# Altium PCB kardio (5).pcbdoc
Units mm, origin at the board's own origin, x right, y up, seen from the top; angles counter-clockwise.
Board outline 75 x 75 mm, 2 copper layers (Top Layer, Bottom Layer); 36 components, 33 nets, 151 pads, 24 vias.
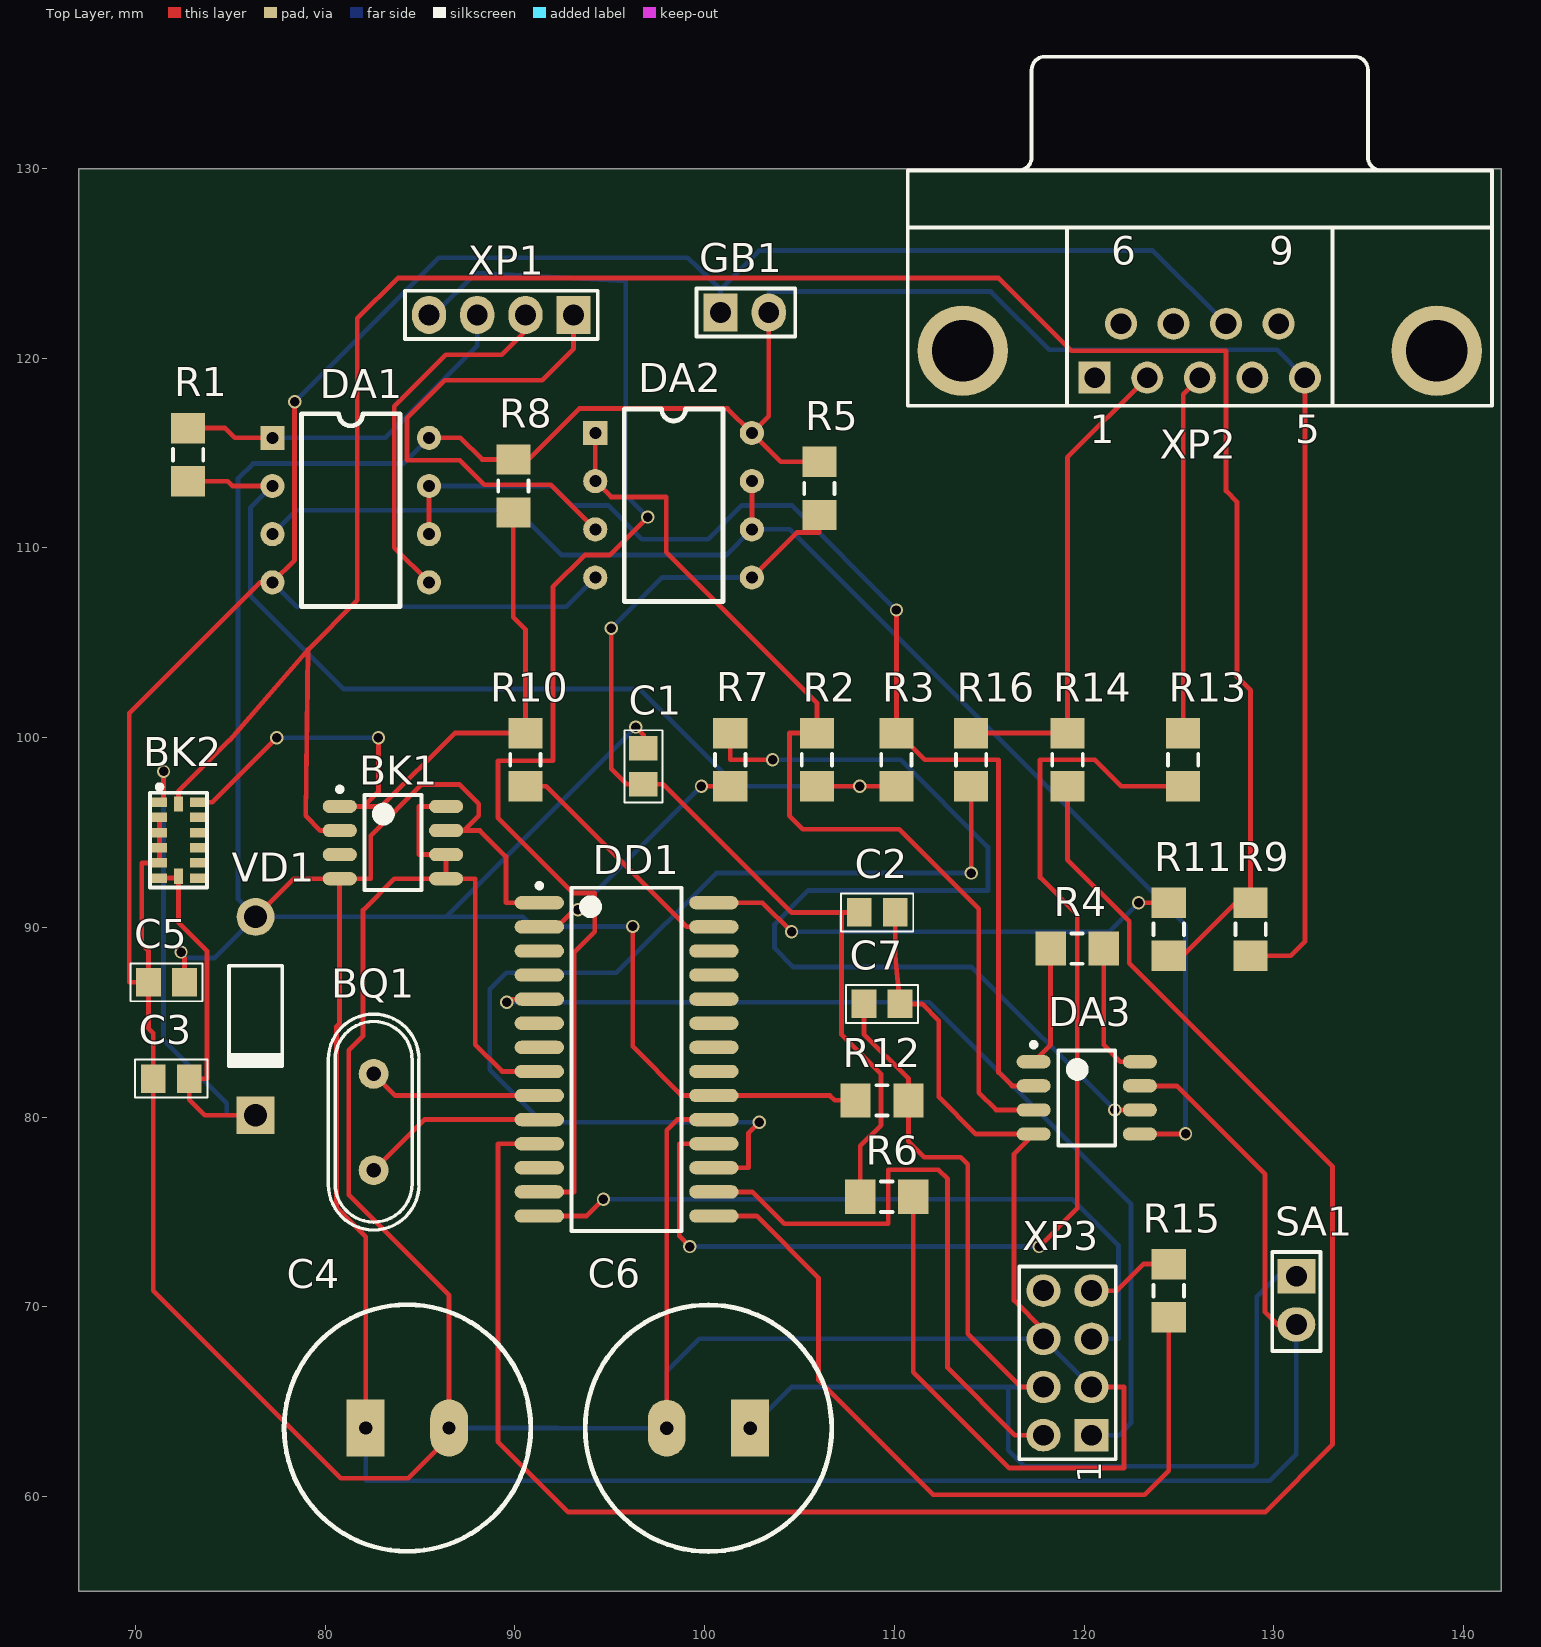
[diagram p0: Top Layer view]
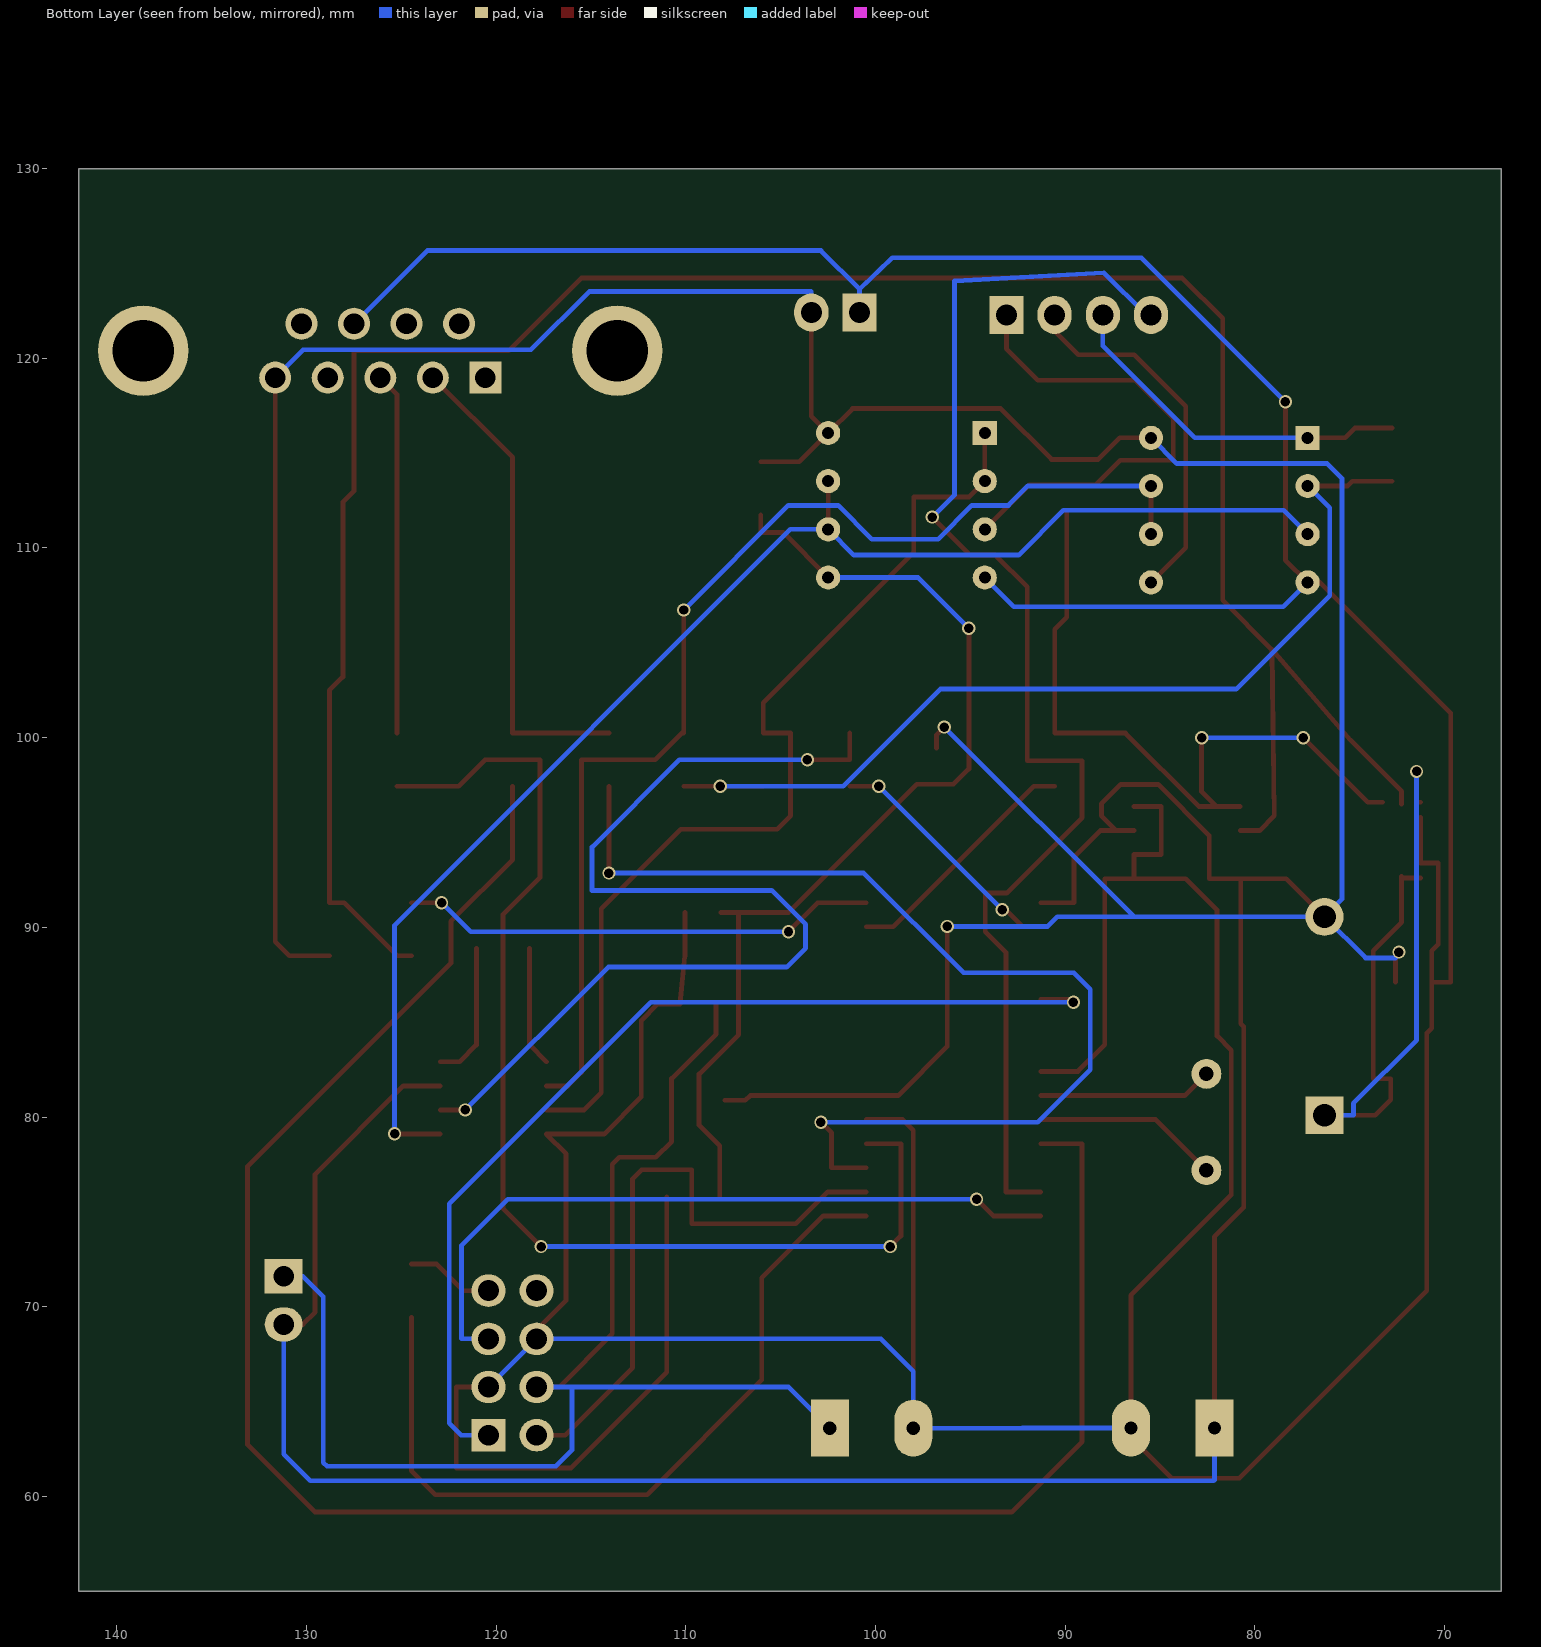
[diagram p1: Bottom Layer view, seen from below]

## Layer stack, top to bottom
Top Layer: signal copper 0.0356
Dielectric: dielectric 0.32, FR-4, Dk 4.8
Bottom Layer: signal copper 0.0356

## Board outline
67,55 142,55 142,130 67,130

## Design rules (kind name [scope] priority, off if disabled: settings)
Clearance [All] p1: gap=0.4
PolygonConnect [All] p1: connectstyle=Relief reliefconductorwidth=0.254 reliefentries=4 polygonreliefangle="90 Angle" airgapwidth=0.254
RoutingCorners [All] p1: cornerstyle=Round minsetback=0.2 maxsetback=2.54
RoutingVias [All] p1: holewidth=0.5 width=0.7 viastyle="Through Hole" minholewidth=0.5 minwidth=0.7 maxholewidth=0.711 maxwidth=1.27
SolderMaskExpansion [All] p1: expansion=0.102
Width [All] p1: maxlimit=0.25 minlimit=0.25 preferedwidth=0.25
27 further rules are at their usual default settings.

## Components (designator, comment, footprint, x,y, rotation, side; value= is the part's Value field where it differs from the comment)
BK1 "DS1621" SOIC-8CM 83.566,94.472 r0 top
BK2 "MMA7455LT" SOJ80P300X0-12M 72.263,94.599 r0 top
BQ1 "10МГц" HC49S 82.55,79.74 r90 top
C1 "0.22мк" C0805 96.774,98.489 r90 top
C2 "0.22мк" C0805 109.093,90.789 r180 top
C3 "0.1мк" C0805 71.882,82.026 r180 top
C4 "1000мк" "LZ 12x26 1000 мкФ x 25 В" 84.328,63.611 r0 top
C5 "0.1мк" C0805 71.628,87.106 r180 top
C6 "1000мк" "LZ 12x26 1000 мкФ x 25 В" 100.2,63.6 r180 top
C7 "0.1мк" C0805 109.347,85.963 r0 top
DA1 "КР1446УД1" PDIP8 77.216,115.808 r0 top
DA2 "КР1446УД1" PDIP8 94.234,116.062 r0 top
DA3 "AD623" SOIC-8CM 120.142,81.01 r0 top
DD1 "PIC16F873A" SOIC-SO28_M 95.885,83.042 r0 top
GB1 "3.6B" Button 104.521,123.428 r0 top
R1 "720К" 1206 72.771,114.919 r270 top
R2 "20К" 1206 105.918,98.841 r90 top
R3 "20К" 1206 110.109,98.841 r90 top
R4 "20К" 1206 119.634,88.884 r180 top
R5 "150К" 1206 106.045,113.141 r90 top
R6 "150К" 1206 109.601,75.803 r180 top
R7 "300" 1206 101.346,98.841 r270 top
R8 "4К7" 1206 89.916,113.268 r270 top
R9 "4К7" 1206 128.778,89.9 r90 top
R10 "300" 1206 90.551,98.841 r270 top
R11 "300" 1206 124.46,89.9 r90 top
R12 "10" 1206 109.347,80.883 r0 top
R13 "300" 1206 125.222,98.841 r90 top
R14 "300" 1206 119.126,98.841 r90 top
R15 "300" 1206 124.46,70.85 r90 top
R16 "300" 1206 114.046,98.841 r90 top
SA1 "Button" Button 132.207,67.929 r270 top
VD1 "КД522" DO-41 76.327,85.328 r270 top
XP1 "INPUT" "HDR1X4 - WA" 93.091,122.285 r180 top
XP2 "COM-port" COM-port 126.1,129.9 r0 top
XP3 "SD-card" "HDR2X4 - wide area" 120.396,63.23 r90 top

## Footprints (in the part's own frame and the unit in brackets; to place one, negate y for a bottom-side part, rotate by r counter-clockwise, add the part's x,y. Pads: shape width x height; smd on the part's side, far side on the other; paste and mask are expansions set on the pad)
1206 [mm] "Chip Resistor; Body 3.1 x 1.6 mm (LxW typ)"
  rect 1.6x1.8 smd: 1(-1.4,0) 2(1.4,0)
  silkscreen extent -0.3,-0.8 0.3,0.8
Button [mm]
  rect 1.8x2 hole 1.1: 1(-3.683,-1.016)
  oval 1.8x2 hole 1.1: 2(-1.143,-1.016)
  silkscreen extent -4.95,-2.29 0.25,0.25
C0805 [mm] "Chip Capacitor; Body 2.0 x 1.2 mm (LxW typ)"
  rect 1.3x1.5 smd: 1(-0.95,0) 2(0.95,0)
  silkscreen extent -1.9,-1 1.91,1
COM-port [mm] "Connector; D Subminiature AMPLIMITE 2000; 9 Position; Right Angle"
  rect 1.69x1.69 hole 1.09: 1(-5.54,-10.92)
  round 1.69 hole 1.09: 2(-2.77,-10.92) 3(0,-10.92) 4(2.77,-10.92) 5(5.54,-10.92) 6(-4.155,-8.08) 7(-1.385,-8.08) 8(1.385,-8.08) 9(4.155,-8.08)
  round 4.76 hole 3.26: 10(-12.495,-9.5) 11(12.495,-9.5)
  silkscreen extent -15.4,-12.4 15.4,6, body extent -15.4,-12.4 15.4,6, height 12.75
DO-41 [mm] "Diode, Axial; Body 5.2 x 2.7 mm (LxDia. max), Lead Dia. 0.86 mm (max)"
  round 2 hole 1.2: 1(-5.23,0)
  rect 2x2 hole 1.2: 2(5.23,0)
  silkscreen extent -2.65,-1.4 2.75,1.4
HC49S [mil]
  round 62 hole 30: 1(-100,0) 2(100,0)
  silkscreen extent -224,-94 224,94
"HDR1X4 - WA" [mm] "Разъем двухрядный, шаг 2,54 мм."
  rect 1.8x2 hole 1.1: 1(0,0)
  oval 1.8x2 hole 1.1: 2(2.54,0) 3(5.08,0) 4(7.62,0)
  silkscreen extent -1.27,-1.27 8.89,1.27
"HDR2X4 - wide area" [mm] "Connector; Header; 4x2 Position"
  rect 1.7x1.8 hole 1.1: 1(0,0)
  oval 1.7x1.8 hole 1.1: 2(0,2.54) 3(2.54,0) 4(2.54,2.54) 5(5.08,0) 6(5.08,2.54) 7(7.62,0) 8(7.62,2.54)
  silkscreen extent -1.27,-1.27 8.89,3.81
"LZ 12x26 1000 мкФ x 25 В" [mm] "D=12.0 d=0.7 S=4.4"
  rect 2x3 hole 0.7: 1(-2.2,0)
  oval 2x3 hole 0.7: 2(2.2,0)
  silkscreen extent -6.5,-6.5 6.5,6.5
PDIP8 [mm]
  rect 1.27x1.27 hole 0.635: 1(0,0)
  round 1.27 hole 0.635: 2(0,-2.54) 3(0,-5.08) 4(0,-7.62) 5(8.255,-7.62) 6(8.255,-5.08) 7(8.255,-2.54) 8(8.255,0)
  silkscreen extent 1.52,-8.89 6.73,1.27
SOIC-8CM [mm] "SOIC, 8-Leads, Body 4.9x3.9mm, Pitch 1.27mm, IPC Low Density"
  oval 1.8x0.7 smd: 1(-2.8,1.905) 2(-2.8,0.635) 3(-2.8,-0.635) 4(-2.8,-1.905) 5(2.8,-1.905) 6(2.8,-0.635) 7(2.8,0.635) 8(2.8,1.905)
  silkscreen extent -2.92,-2.5 1.5,2.93, body extent -2,-2.5 2,2.5, height 1.73
SOIC-SO28_M [mm] "SOIC, 28-Leads, Body 17.9x7.5mm, Pitch 1.27mm, IPC Low Density"
  oval 2.6x0.7 smd: 1(-4.6,8.255) 2(-4.6,6.985) 3(-4.6,5.715) 4(-4.6,4.445) 5(-4.6,3.175) 6(-4.6,1.905) 7(-4.6,0.635) 8(-4.6,-0.635) 9(-4.6,-1.905) 10(-4.6,-3.175) 11(-4.6,-4.445) 12(-4.6,-5.715) 13(-4.6,-6.985) 14(-4.6,-8.255) 15(4.6,-8.255) 16(4.6,-6.985) 17(4.6,-5.715) 18(4.6,-4.445) 19(4.6,-3.175) 20(4.6,-1.905) 21(4.6,-0.635) 22(4.6,0.635) 23(4.6,1.905) 24(4.6,3.175) 25(4.6,4.445) 26(4.6,5.715) 27(4.6,6.985) 28(4.6,8.255)
  silkscreen extent -4.72,-9.05 2.9,9.28, body extent -3.8,-9.06 3.8,9.06, height 2.65
SOJ80P300X0-12M [mm] "SOJ, 12-Leads, Body 5,00x3,00mm, Pitch 0,80mm, IPC Low Density"
  rect 0.8x0.5 smd: 1(-1,2) 2(-1,1.2) 3(-1,0.4) 4(-1,-0.4) 5(-1,-1.2) 6(-1,-2) 8(1,-2) 9(1,-1.2) 10(1,-0.4) 11(1,0.4) 12(1,1.2) 13(1,2)
  rect 0.5x0.8 smd: 7(0,-1.905) 14(0,1.905)
  silkscreen extent -1.5,-2.5 1.5,2.92, body extent -1.5,-2.5 1.5,2.5, height 0.01

## Part data
BK1: "Temperature sensor"
BK2: "Digital Output Accelerometer"
BQ1: library part "Cristal Oscilator"
C1 C2 C3 C5 C7: library part Capasitior
C4 C6: library part "Capasitor electrolit"
DA3: "Amplifier"
DD1: library part PIC16F873A-I/SO, "Enhanced FLASH Microcontroller, 4K (x14-Bit words) FLASH, 192 Bytes RAM, 28-Pin SOIC, Standard VDD Range, Industrial Temperature"
GB1: library part Batery
R1 R2 R3 R4 R5 R6 R7 R8 R9 R10 R11 R12 R13 R14 R15 R16: library part Resistor

## Via types
v1: diameter 0.7, hole 0.5, Top Layer to Bottom Layer, 24 vias

## Nets (pads, with @x,y where several pads share a name; then routed paths per layer and width w, separated by ;. In a path a pad name is that pad's centre, name@x,y a point inside that pad or via, vN(x,y) a via of type N, cw(c..) or ccw(c..) an arc to the next point about the centre after c; other vN are vias at no path point)
3.6В: BK1.4 BK1.7 C1.2 C4.1 C5.1 DA1.8 DA2.8 DA3.7 DD1.1 DD1.20 GB1.2 R5.2 R8.1 R9.1 R12.1 SA1.2 VD1.1 XP2.5 | length 322
  Top Layer w0.25: C5.1 72.578,88.392 ; VD1.1 78.336,92.567 BK1.4@80.747,92.567 ; C4.1 82.128,73.697 80.588,75.238 80.588,84.774 80.747,84.933 BK1.4@80.747,92.567 ; DA1.8 87.122,115.808 88.262,114.668 R8.1 90.716,114.668 93.396,117.348 101.203,117.348 DA2.8 ; BK1.7 87.309,95.107 ; DD1.1 89.526,91.297 89.526,93.735 88.154,95.107 87.309,95.107 ; v1(96.208,90.052) 96.208,83.725 98.797,81.137 DD1.20 106.604,81.137 106.858,80.883 R12.1 ; v1(96.368,100.559) 96.774,100.152 C1.2 ; GB1.2 103.378,116.951 DA2.8 ; R5.2 104.01,114.541 DA2.8 ; DA3.7 124.882,81.645 129.54,76.987 129.54,69.707 130.175,69.072 SA1.2 ; R9.1 130.886,88.5 131.64,89.254 XP2.5 ; BK1.4@80.747,92.567 BK1.4 82.398,92.567 82.398,94.844 85.09,97.536 87.071,97.536 88.087,96.52 88.087,95.885 87.309,95.107
  Bottom Layer w0.25: 72.578,88.392 74.161,88.392 VD1.1 ; C4.1 82.128,60.874 82.169,60.833 129.794,60.833 131.191,62.23 SA1.2 ; DA1.8 84.115,114.452 76.193,114.452 75.406,113.665 75.406,91.479 VD1.1 ; v1(96.208,90.052) 90.914,90.052 90.409,90.558 86.367,90.558 ; v1(96.368,100.559) 86.367,90.558 ; GB1.2 103.378,123.52 115.087,123.52 118.161,120.447 130.173,120.447 XP2.5 ; VD1.1 86.367,90.558
  other v1: 72.4,88.7
CS: DD1.5 XP3.1 | length 53
  Top Layer w0.25: v1(89.56,86.055) 89.722,86.217 DD1.5
  Bottom Layer w0.25: v1(89.56,86.055) 111.836,86.055 122.471,75.42 122.471,63.857 121.844,63.23 XP3.1
GND: BK1.5 BK1.6 BK1.8 BK2.2 BK2.3 BK2.4 BK2.5 C2.1 C3.2 C4.2 C5.2 C6.2 C7.2 DA1.4 DA2.4 DA3.4 DD1.8 DD1.19 GB1.1 R6.1 XP2.8 XP3.3 XP3.6 | length 327.8
  Top Layer w0.25: BK2.2 BK2.3 BK2.4 BK2.5 70.333,93.399 70.333,89.103 70.678,88.758 C5.2 ; v1(78.384,117.704) 78.384,109.356 DA1.4 76.565,108.188 69.672,101.295 69.672,87.106 C5.2 ; BK1.8 84.938,96.377 84.938,93.837 BK1.6 BK1.5 ; DD1.8 89.322,82.407 87.909,83.82 87.909,92.567 BK1.5 ; C6.2 98,79.31 98.557,79.867 DD1.19 ; C2.1 110.043,88.494 C7.2 111.471,85.963 112.344,85.09 112.344,81.061 114.3,79.105 DA3.4 116.307,78.07 116.307,70.333 117.856,68.783 XP3.6 ; R6.1 111.001,66.551 116.052,61.5 122.1,61.5 122.1,65.77 XP3.3 ; C5.2 70.678,84.684 70.932,84.43 C3.2 70.932,70.841 80.813,60.96 84.369,60.96 86.528,63.119 C4.2 86.528,70.605 81.238,75.895 81.238,83.524 81.991,84.277 81.991,90.914 83.644,92.567 BK1.5
  Bottom Layer w0.25: DA1.4 78.495,106.909 92.701,106.909 DA2.4 ; v1(78.384,117.704) 85.979,125.298 99.111,125.298 100.838,123.647 ; C4.2 92.253,63.611 92.264,63.6 C6.2 98,66.599 99.711,68.31 XP3.6 XP3.3 ; GB1.1 100.838,123.647 ; XP2.8 123.626,125.679 102.87,125.679 100.838,123.647
IN: DD1.13 XP1.4 | length 70.6
  Top Layer w0.25: DD1.13 93.116,76.057 93.116,88.678 94.21,89.772 94.21,91.807 93.08,91.807 89.103,95.783 89.103,98.781 91.999,98.781 91.999,107.95 93.675,109.626 94.996,109.626 v1(96.998,111.628)
  Bottom Layer w0.25: XP1.4 85.725,122.285 87.951,124.511 95.834,124.079 95.834,112.792 v1(96.998,111.628)
NetBK1_1: BK1.1 BK2.13 R8.2 R10.1 | length 38.2
  Top Layer w0.25: BK2.13 74.044,96.599 v1(77.445,100) ; BK1.1 82.026,96.377 ; v1(82.804,100) 82.804,97.155 82.026,96.377 ; R8.2 89.916,106.35 90.551,105.715 R10.1 86.82,100.241 82.956,96.377 82.026,96.377
  Bottom Layer w0.25: v1(77.445,100) v1(82.804,100)
NetBK1_2: BK1.2 BK2.14 R9.2 R11.1 | length 123.6
  Top Layer w0.25: BK2.14 72.263,97.166 74.975,99.878 79.096,104.648 ; BK1.2 79.747,95.107 78.969,95.885 79.096,104.648 ; R11.1 125.197,88.5 127.997,91.3 R9.2 128.778,102.489 128.067,103.2 128.067,112.42 127.483,113.005 127.483,120.396 119.329,120.396 115.494,124.231 83.82,124.231 81.686,122.098 81.686,107.239 79.096,104.648
NetBK2_1: BK2.1 BK2.6 BK2.7 C3.1 VD1.2 | length 41
  Top Layer w0.25: BK2.6 BK2.7@72.263,92.599 ; BK2.1 71.476,96.599 v1(71.476,98.222) ; BK2.7 BK2.7@72.263,92.599 ; VD1.2 73.66,80.098 72.832,80.926 C3.1 73.762,82.026 73.762,88.773 72.263,90.272 BK2.7@72.263,92.599
  Bottom Layer w0.25: v1(71.476,98.222) 71.476,84.049 74.803,80.721 74.803,80.098 VD1.2
NetBQ1_1: BQ1.1 DD1.10 | length 9.8
  Top Layer w0.25: BQ1.1 85.217,79.867 DD1.10
NetBQ1_2: BQ1.2 DD1.9 | length 9.2
  Top Layer w0.25: BQ1.2 83.693,81.137 DD1.9
NetC1_1: C1.1 C2.2 DA2.5 R5.1 R6.2 | length 53.9
  Top Layer w0.25: v1(95.072,105.766) 95.072,98.352 95.885,97.539 C1.1 97.816,97.539 104.566,90.789 107.213,90.789 ; DA2.5 104.867,110.82 106.045,110.82 R5.1 ; C2.2 107.213,90.789 ; R6.2 108.201,78.486 109.296,79.581 109.296,82.271 107.213,84.353 107.213,90.789
  Bottom Layer w0.25: v1(95.072,105.766) 97.749,108.442 DA2.5
NetDA1_1: DA1.1 R1.1 XP1.3 | length 19.1
  Top Layer w0.25: R1.1 74.727,116.319 75.238,115.808 DA1.1
  Bottom Layer w0.25: DA1.1 83.169,115.808 88.011,120.65 XP1.3
NetDA1_2: DA1.2 R1.2 R2.1 R3.1 | length 51.3
  Top Layer w0.25: R1.2 74.854,113.519 75.105,113.268 DA1.2 ; R2.1 v1(108.172,97.441) R3.1
  Bottom Layer w0.25: DA1.2 76.056,112.108 76.056,107.484 80.975,102.565 96.571,102.565 101.695,97.441 v1(108.172,97.441)
NetDA1_3: DA1.3 DA2.6 DA2.7 DA3.5 | length 74.8
  Top Layer w0.25: DA2.6 DA2.7 ; DA3.5 125.333,79.105 v1(125.349,79.121)
  Bottom Layer w0.25: DA1.3 78.477,111.989 90.094,111.989 92.455,109.627 101.134,109.627 DA2.6 104.486,110.982 125.349,90.119 v1(125.349,79.121)
NetDA1_5: DA1.5 XP1.2 | length 19.4
  Top Layer w0.25: DA1.5 83.642,110.017 83.642,117.475 86.36,120.193 89.306,120.193 90.551,121.437 XP1.2
NetDA1_6: DA1.6 DA1.7 DA3.2 R3.2 | length 62.4
  Top Layer w0.25: DA1.6 DA1.7 ; v1(110.109,106.731) R3.2 110.198,100.241 111.608,98.831 115.494,98.831 115.494,82.356 116.205,81.645 DA3.2
  Bottom Layer w0.25: DA1.7 91.964,113.268 92.989,112.243 94.911,112.243 96.689,110.465 100.183,110.465 101.961,112.243 104.597,112.243 v1(110.109,106.731)
NetDA2_1: DA2.1 DA2.2 DA3.3 R2.2 | length 53.2
  Top Layer w0.25: DA2.1 DA2.2 95.063,112.693 97.979,112.693 97.979,109.777 105.918,101.838 R2.2 104.47,100.241 104.47,95.885 105.181,95.174 110.261,95.174 114.452,90.983 114.452,81.28 115.357,80.375 DA3.3
NetDA2_3: DA2.3 XP1.1 | length 25.7
  Top Layer w0.25: XP1.1 93.091,120.498 91.44,118.847 86.309,118.847 84.303,116.84 84.303,114.63 87.097,114.63 88.392,113.335 91.881,113.335 DA2.3
NetDA3_1: DA3.1 R4.2 | length 6.3
  Top Layer w0.25: DA3.1 118.234,83.807 R4.2
NetDA3_6: DA3.6 R7.1 | length 55.2
  Top Layer w0.25: R7.1 101.346,98.831 v1(103.581,98.831) ; v1(121.615,80.375) DA3.6
  Bottom Layer w0.25: v1(103.581,98.831) 110.338,98.831 114.935,94.234 114.935,91.948 105.461,91.948 103.683,90.17 103.683,88.9 104.673,87.909 114.081,87.909 v1(121.615,80.375)
NetDA3_8: DA3.8 R4.1 | length 7.4
  Top Layer w0.25: R4.1 121.034,83.801 121.92,82.915 DA3.8
NetDD1_2: DD1.2 R7.2 | length 13.1
  Top Layer w0.25: DD1.2 92.227,90.027 93.132,90.932 v1(93.32,90.932) ; v1(99.828,97.441) R7.2
  Bottom Layer w0.25: v1(93.32,90.932) v1(99.828,97.441)
NetDD1_11: DD1.11 R14.1 | length 105.4
  Top Layer w0.25: DD1.11 89.103,78.597 89.103,62.897 92.818,59.182 129.54,59.182 133.1,62.742 133.1,77.39 122.377,88.113 122.377,90.322 119.126,93.574 R14.1
NetDD1_15: DD1.15 R15.1 | length 41.8
  Top Layer w0.25: DD1.15 102.743,74.787 105.994,71.536 105.994,66.142 112.039,60.096 123.19,60.096 124.46,61.366 R15.1
NetDD1_17: DD1.17 R16.1 | length 56.5
  Top Layer w0.25: DD1.17 102.311,77.327 102.311,79.172 v1(102.87,79.731) ; v1(114.046,92.862) R16.1
  Bottom Layer w0.25: v1(102.87,79.731) 91.44,79.731 88.671,82.499 88.671,86.741 89.535,87.605 95.352,87.605 100.609,92.862 v1(114.046,92.862)
NetDD1_18: DD1.18 R13.1 | length 61.3
  Top Layer w0.25: v1(99.212,73.177) 98.654,73.736 98.654,78.597 DD1.18 ; v1(117.627,73.177) 119.634,75.184 119.634,90.678 117.678,92.634 117.678,98.831 120.574,98.831 121.964,97.441 R13.1
  Bottom Layer w0.25: v1(99.212,73.177) v1(117.627,73.177)
NetDD1_27: DD1.27 R10.2 | length 13
  Top Layer w0.25: R10.2 91.646,97.441 99.06,90.027 DD1.27
NetDD1_28: DD1.28 R11.2 | length 25.2
  Top Layer w0.25: DD1.28 103.048,91.297 v1(104.581,89.764) ; v1(122.872,91.3) R11.2
  Bottom Layer w0.25: v1(104.581,89.764) 121.336,89.764 v1(122.872,91.3)
RX: R13.2 XP2.3 | length 19.1
  Top Layer w0.25: R13.2 125.222,118.102 XP2.3
SCK: DD1.14 XP3.5 | length 38.3
  Top Layer w0.25: DD1.14 93.786,74.787 v1(94.666,75.667)
  Bottom Layer w0.25: v1(94.666,75.667) 119.38,75.667 121.821,73.226 121.821,68.31 XP3.5
SDI: R15.2 XP3.7 | length 4.6
  Top Layer w0.25: XP3.7 121.717,70.85 123.117,72.25 R15.2
SDO: DD1.16 XP3.2 | length 32.6
  Top Layer w0.25: DD1.16 102.514,76.057 104.2,74.371 109.676,74.371 109.676,77.228 112.326,77.228 112.801,76.753 112.801,66.786 116.357,63.23 XP3.2
TX: R14.2 R16.2 XP2.2 | length 25.6
  Top Layer w0.25: R16.2 R14.2 119.126,114.776 XP2.2
VDD: C6.1 C7.1 R12.2 SA1.1 XP3.4 | length 70.4
  Top Layer w0.25: C7.1 108.397,84.379 110.747,82.029 R12.2 110.747,78.712 111.58,77.878 113.495,77.878 113.868,77.505 113.868,68.58 116.678,65.77 XP3.4
  Bottom Layer w0.25: C6.1 104.57,65.77 XP3.4 ; 116,65.77 116,62.435 116.84,61.595 128.905,61.595 129.1,61.79 129.1,70.537 130.175,71.612 SA1.1
pads on no net: BK1.3 BK2.8 BK2.9 BK2.10 BK2.11 BK2.12 DD1.3 DD1.4 DD1.6 DD1.7 DD1.12 DD1.21 DD1.22 DD1.23 DD1.24 DD1.25 DD1.26 XP2.1 XP2.4 XP2.6 XP2.7 XP2.9 XP2.10 XP2.11 XP3.8

## Text inside footprints (layer, text, board x,y; h text height)
XP2: Top Overlay "1" at 120.31,115.525 h1.5; Top Overlay "5" at 131.14,115.525 h1.5; Top Overlay "9" at 129.755,124.925 h1.5; Top Overlay "6" at 121.445,124.925 h1.5
XP3: Top Overlay "1" at 120.896,60.73 h1.27 r90